# EAGLE board SparkFun_Qwiic_FS3000_proto_panel (EAGLE 9.6.2)
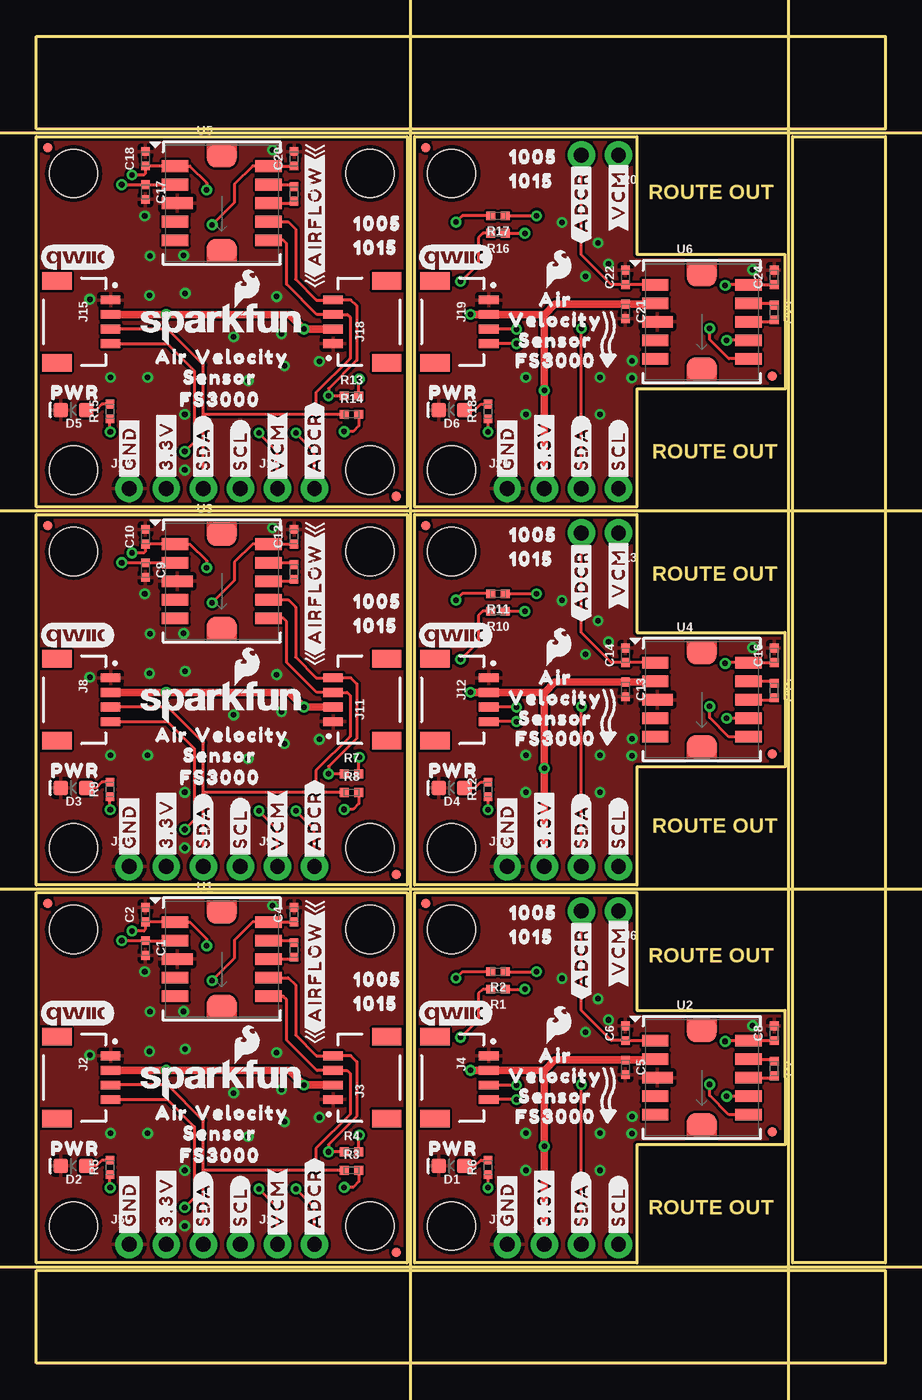
[diagram p0: board, top side]
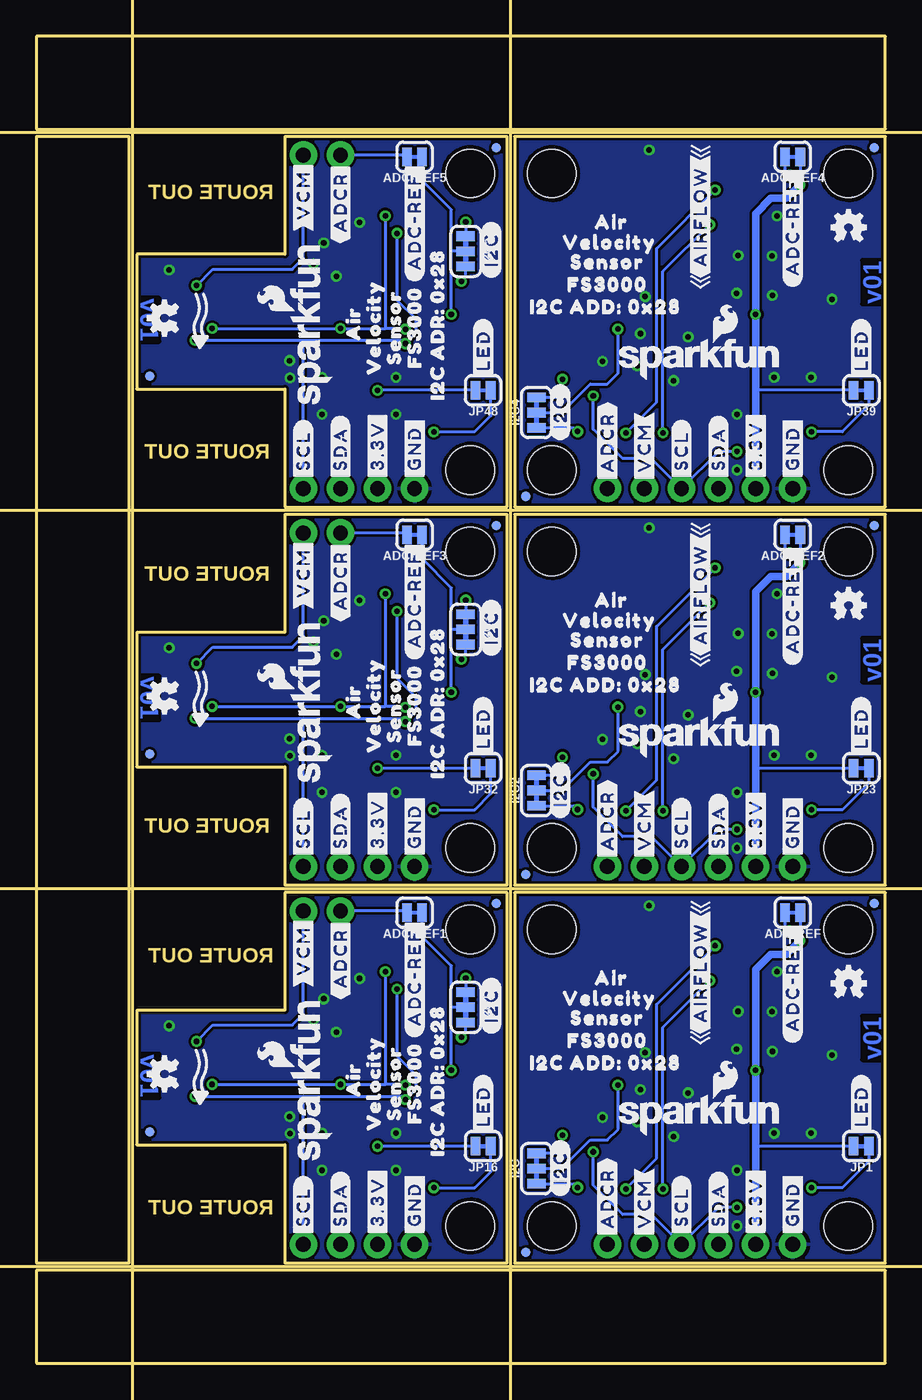
[diagram p1: board, bottom side, seen from below]

Size 58.17 x 90.93 mm. Coordinates in mm from the lower left corner, seen from the top.
Outline: 0,6.86 0,32.26 25.4,32.26 25.4,6.86 0,6.86
Outline: 25.91,6.86 25.91,32.26 41.15,32.26 41.15,24.18 51.28,24.18 51.31,14.96 41.15,14.96 41.15,6.86 25.91,6.86
Outline: 0,32.77 0,58.17 25.4,58.17 25.4,32.77 0,32.77
Outline: 25.91,32.77 25.91,58.17 41.15,58.17 41.15,50.09 51.28,50.09 51.31,40.87 41.15,40.87 41.15,32.77 25.91,32.77
Outline: 0,58.67 0,84.07 25.4,84.07 25.4,58.67 0,58.67
Outline: 25.91,58.67 25.91,84.07 41.15,84.07 41.15,76 51.28,76 51.31,66.78 41.15,66.78 41.15,58.67 25.91,58.67
Outline: 58.17,6.86 51.82,6.86 51.82,84.07 58.17,84.07 58.17,6.86
Outline: 58.17,90.93 58.17,84.58 0,84.58 0,90.93 58.17,90.93
Outline: 58.17,6.35 58.17,0 0,0 0,6.35 58.17,6.35
Copper layers (1*16): Top 0.035mm / dielectric 1.5mm / Bottom 0.035mm
Design rules "SparkFun-2-Layer-General-JLCPCB": minimum track width 7mil, minimum drill 0.3mm, track to track 7mil, track to pad 7mil, pad to pad 7mil, via to via 7mil, smd to smd 7mil, copper to edge 7mil, drill to drill 7mil, minimum pad ring 7mil, minimum via ring 7mil, stop-mask expansion 3mil, vias tented up to drill 25mil, thermal gap 10mil
Milling: 6 lines

## Footprints (pad centres in the part's own frame; a part is rotated, then mirrored left to right if it is on the bottom)
SMT-JUMPER_2_NC_TRACE_SILK = smd 0.66 x 1.27: 1 -0.521,0; 2 0.521,0
0402-TIGHT = smd 0.6 x 0.6: 1 -0.5,0; 2 0.5,0
LED-0603 = smd 1 x 1: A -0.877,0; C 0.877,0
SMT-JUMPER_3_2-NC_TRACE_SILK = smd 0.66 x 1.27: 1 -1.041,0; 2 0,0; 3 1.041,0
1X02_NO_SILK = drill 1.016 pad 1.88: 1 0,0; 2 2.54,0
JST04_1MM_RA = smd 0.6 x 1.35: 1 -1.5,0; 2 -0.5,0; 3 0.5,0; 4 1.5,0 | smd 1.2 x 2: NC1 2.8,-3.675; NC2 -2.8,-3.675
1X04_NO_SILK = drill 1.016 pad 1.88: 1 0,0; 2 2.54,0; 3 5.08,0; 4 7.62,0
FIDUCIAL-MICRO = smd 0.635 x 0.635: 1 0,0
STAND-OFF = hole 3.302: 0,0
FS3000 = smd 1.8 x 0.8: 1 -3.2,2.54; 2 -3.2,1.27; 4 -3.2,-1.27; 5 -3.2,-2.54; 6 3.2,-2.54; 7 3.2,-1.27; 8 3.2,0; 9 3.2,1.27; 10 3.2,2.54 | smd 2.1 x 0.8: 3 -3.05,0 | smd 2 x 1.59: 11 0,-3.24; 12 0,3.24

## Placement (x,y rotation side)
ADC-REF  [SMT-JUMPER_2_NC_TRACE_SILK]  6.35,30.86 180 bottom
ADC-REF1  [SMT-JUMPER_2_NC_TRACE_SILK]  32.26,30.86 180 bottom
ADC-REF2  [SMT-JUMPER_2_NC_TRACE_SILK]  6.35,56.77 180 bottom
ADC-REF3  [SMT-JUMPER_2_NC_TRACE_SILK]  32.26,56.77 180 bottom
ADC-REF4  [SMT-JUMPER_2_NC_TRACE_SILK]  6.35,82.68 180 bottom
ADC-REF5  [SMT-JUMPER_2_NC_TRACE_SILK]  32.26,82.68 180 bottom
C1  0.1uF  [0402-TIGHT]  7.47,28.45 270 top
C2  0.1uF  [0402-TIGHT]  7.47,30.73 90 top
C3  0.1uF  [0402-TIGHT]  17.65,28.32 270 top
C4  1.0uF  [0402-TIGHT]  17.65,30.73 90 top
C5  0.1uF  [0402-TIGHT]  40.36,20.27 270 top
C6  0.1uF  [0402-TIGHT]  40.36,22.61 90 top
C7  0.1uF  [0402-TIGHT]  50.55,20.19 270 top
C8  1.0uF  [0402-TIGHT]  50.55,22.61 90 top
C9  0.1uF  [0402-TIGHT]  7.47,54.36 270 top
C10  0.1uF  [0402-TIGHT]  7.47,56.64 90 top
C11  0.1uF  [0402-TIGHT]  17.65,54.23 270 top
C12  1.0uF  [0402-TIGHT]  17.65,56.64 90 top
C13  0.1uF  [0402-TIGHT]  40.36,46.18 270 top
C14  0.1uF  [0402-TIGHT]  40.36,48.51 90 top
C15  0.1uF  [0402-TIGHT]  50.55,46.1 270 top
C16  1.0uF  [0402-TIGHT]  50.55,48.51 90 top
C17  0.1uF  [0402-TIGHT]  7.47,80.26 270 top
C18  0.1uF  [0402-TIGHT]  7.47,82.55 90 top
C19  0.1uF  [0402-TIGHT]  17.65,80.14 270 top
C20  1.0uF  [0402-TIGHT]  17.65,82.55 90 top
C21  0.1uF  [0402-TIGHT]  40.36,72.09 270 top
C22  0.1uF  [0402-TIGHT]  40.36,74.42 90 top
C23  0.1uF  [0402-TIGHT]  50.55,72.01 270 top
C24  1.0uF  [0402-TIGHT]  50.55,74.42 90 top
D1  RED  [LED-0603]  28.45,13.51 180 top
D2  RED  [LED-0603]  2.54,13.51 180 top
D3  RED  [LED-0603]  2.54,39.42 180 top
D4  RED  [LED-0603]  28.45,39.42 180 top
D5  RED  [LED-0603]  2.54,65.33 180 top
D6  RED  [LED-0603]  28.45,65.33 180 top
I2C  [SMT-JUMPER_3_2-NC_TRACE_SILK]  23.9,13.34 90 bottom
I2C1  [SMT-JUMPER_3_2-NC_TRACE_SILK]  28.75,24.38 270 bottom
I2C2  [SMT-JUMPER_3_2-NC_TRACE_SILK]  23.9,39.24 90 bottom
I2C3  [SMT-JUMPER_3_2-NC_TRACE_SILK]  28.75,50.29 270 bottom
I2C4  [SMT-JUMPER_3_2-NC_TRACE_SILK]  23.9,65.15 90 bottom
I2C5  [SMT-JUMPER_3_2-NC_TRACE_SILK]  28.75,76.2 270 bottom
J1  [1X02_NO_SILK]  16.51,8.13 0 top
J2  QWIIC_RA  [JST04_1MM_RA]  5.08,19.56 270 top
J3  QWIIC_RA  [JST04_1MM_RA]  20.32,19.56 90 top
J4  QWIIC_RA  [JST04_1MM_RA]  30.99,19.56 270 top
J5  [1X04_NO_SILK]  6.35,8.13 0 top
J6  [1X02_NO_SILK]  39.88,30.99 180 top
J7  [1X04_NO_SILK]  32.26,8.13 0 top
J8  QWIIC_RA  [JST04_1MM_RA]  5.08,45.47 270 top
J9  [1X02_NO_SILK]  16.51,34.04 0 top
J10  [1X04_NO_SILK]  6.35,34.04 0 top
J11  QWIIC_RA  [JST04_1MM_RA]  20.32,45.47 90 top
J12  QWIIC_RA  [JST04_1MM_RA]  30.99,45.47 270 top
J13  [1X02_NO_SILK]  39.88,56.9 180 top
J14  [1X04_NO_SILK]  32.26,34.04 0 top
J15  QWIIC_RA  [JST04_1MM_RA]  5.08,71.37 270 top
J16  [1X02_NO_SILK]  16.51,59.94 0 top
J17  [1X04_NO_SILK]  6.35,59.94 0 top
J18  QWIIC_RA  [JST04_1MM_RA]  20.32,71.37 90 top
J19  QWIIC_RA  [JST04_1MM_RA]  30.99,71.37 270 top
J20  [1X02_NO_SILK]  39.88,82.8 180 top
J21  [1X04_NO_SILK]  32.26,59.94 0 top
JP1  LED  [SMT-JUMPER_2_NC_TRACE_SILK]  1.65,14.86 180 bottom
JP2  FIDUCIALUFIDUCIAL  [FIDUCIAL-MICRO]  24.64,7.59 0 top
JP3  STAND-OFF  [STAND-OFF]  2.54,29.72 0 top
JP4  STAND-OFF  [STAND-OFF]  22.86,29.72 0 top
JP5  FIDUCIALUFIDUCIAL  [FIDUCIAL-MICRO]  0.76,31.5 0 bottom
JP6  FIDUCIALUFIDUCIAL  [FIDUCIAL-MICRO]  0.76,31.5 0 top
JP7  STAND-OFF  [STAND-OFF]  22.86,9.4 0 top
JP8  STAND-OFF  [STAND-OFF]  2.54,9.4 0 top
JP9  STAND-OFF  [STAND-OFF]  28.45,29.72 0 top
JP10  FIDUCIALUFIDUCIAL  [FIDUCIAL-MICRO]  50.42,15.85 0 top
JP11  FIDUCIALUFIDUCIAL  [FIDUCIAL-MICRO]  24.64,7.59 0 bottom
JP12  FIDUCIALUFIDUCIAL  [FIDUCIAL-MICRO]  26.67,31.5 0 top
JP13  FIDUCIALUFIDUCIAL  [FIDUCIAL-MICRO]  50.42,15.85 0 bottom
JP14  FIDUCIALUFIDUCIAL  [FIDUCIAL-MICRO]  26.67,31.5 0 bottom
JP15  STAND-OFF  [STAND-OFF]  28.45,9.4 0 top
JP16  LED  [SMT-JUMPER_2_NC_TRACE_SILK]  27.56,14.86 180 bottom
JP17  STAND-OFF  [STAND-OFF]  2.54,55.63 0 top
JP18  FIDUCIALUFIDUCIAL  [FIDUCIAL-MICRO]  24.64,33.5 0 top
JP19  FIDUCIALUFIDUCIAL  [FIDUCIAL-MICRO]  0.76,57.4 0 top
JP20  FIDUCIALUFIDUCIAL  [FIDUCIAL-MICRO]  24.64,33.5 0 bottom
JP21  FIDUCIALUFIDUCIAL  [FIDUCIAL-MICRO]  0.76,57.4 0 bottom
JP22  STAND-OFF  [STAND-OFF]  2.54,35.31 0 top
JP23  LED  [SMT-JUMPER_2_NC_TRACE_SILK]  1.65,40.77 180 bottom
JP24  STAND-OFF  [STAND-OFF]  22.86,55.63 0 top
JP25  STAND-OFF  [STAND-OFF]  22.86,35.31 0 top
JP26  STAND-OFF  [STAND-OFF]  28.45,55.63 0 top
JP27  FIDUCIALUFIDUCIAL  [FIDUCIAL-MICRO]  50.42,41.76 0 top
JP28  FIDUCIALUFIDUCIAL  [FIDUCIAL-MICRO]  26.67,57.4 0 top
JP29  FIDUCIALUFIDUCIAL  [FIDUCIAL-MICRO]  50.42,41.76 0 bottom
JP30  FIDUCIALUFIDUCIAL  [FIDUCIAL-MICRO]  26.67,57.4 0 bottom
JP31  STAND-OFF  [STAND-OFF]  28.45,35.31 0 top
JP32  LED  [SMT-JUMPER_2_NC_TRACE_SILK]  27.56,40.77 180 bottom
JP33  STAND-OFF  [STAND-OFF]  2.54,81.53 0 top
JP34  FIDUCIALUFIDUCIAL  [FIDUCIAL-MICRO]  24.64,59.41 0 top
JP35  FIDUCIALUFIDUCIAL  [FIDUCIAL-MICRO]  0.76,83.31 0 top
JP36  FIDUCIALUFIDUCIAL  [FIDUCIAL-MICRO]  24.64,59.41 0 bottom
JP37  FIDUCIALUFIDUCIAL  [FIDUCIAL-MICRO]  0.76,83.31 0 bottom
JP38  STAND-OFF  [STAND-OFF]  2.54,61.21 0 top
JP39  LED  [SMT-JUMPER_2_NC_TRACE_SILK]  1.65,66.67 180 bottom
JP40  STAND-OFF  [STAND-OFF]  22.86,81.53 0 top
JP41  STAND-OFF  [STAND-OFF]  22.86,61.21 0 top
JP42  STAND-OFF  [STAND-OFF]  28.45,81.53 0 top
JP43  FIDUCIALUFIDUCIAL  [FIDUCIAL-MICRO]  50.42,67.67 0 top
JP44  FIDUCIALUFIDUCIAL  [FIDUCIAL-MICRO]  26.67,83.31 0 top
JP45  FIDUCIALUFIDUCIAL  [FIDUCIAL-MICRO]  50.42,67.67 0 bottom
JP46  FIDUCIALUFIDUCIAL  [FIDUCIAL-MICRO]  26.67,83.31 0 bottom
JP47  STAND-OFF  [STAND-OFF]  28.45,61.21 0 top
JP48  LED  [SMT-JUMPER_2_NC_TRACE_SILK]  27.56,66.67 180 bottom
LOGO1  OSHW-LOGOMINI  [OSHW-LOGO-MINI]  2.51,26.04 0 bottom
LOGO2  OSHW-LOGOMINI  [OSHW-LOGO-MINI]  49.4,19.81 90 bottom
LOGO3  SFE_LOGO_NAME_FLAME.1_INCH  [SFE_LOGO_NAME_FLAME_.1]  12.7,17.02 0 bottom
LOGO4  QWIIC_LOGO_5MM  [QWIIC_5MM]  2.79,24 0 top
LOGO5  SFE_LOGO_NAME_FLAME.1_INCH  [SFE_LOGO_NAME_FLAME_.1]  12.7,19.43 0 top
LOGO6  QWIIC_LOGO_5MM  [QWIIC_5MM]  28.7,24 0 top
LOGO7  SFE_LOGO_FLAME.1_INCH  [SFE_LOGO_FLAME_.1]  35.79,23.19 0 top
LOGO8  SFE_LOGO_NAME_FLAME.1_INCH  [SFE_LOGO_NAME_FLAME_.1]  39.37,19.43 90 bottom
LOGO9  OSHW-LOGOMINI  [OSHW-LOGO-MINI]  2.51,51.94 0 bottom
LOGO10  QWIIC_LOGO_5MM  [QWIIC_5MM]  2.79,49.91 0 top
LOGO11  SFE_LOGO_NAME_FLAME.1_INCH  [SFE_LOGO_NAME_FLAME_.1]  12.7,45.34 0 top
LOGO12  SFE_LOGO_NAME_FLAME.1_INCH  [SFE_LOGO_NAME_FLAME_.1]  12.7,42.93 0 bottom
LOGO13  OSHW-LOGOMINI  [OSHW-LOGO-MINI]  49.4,45.72 90 bottom
LOGO14  QWIIC_LOGO_5MM  [QWIIC_5MM]  28.7,49.91 0 top
LOGO15  SFE_LOGO_FLAME.1_INCH  [SFE_LOGO_FLAME_.1]  35.79,49.1 0 top
LOGO16  SFE_LOGO_NAME_FLAME.1_INCH  [SFE_LOGO_NAME_FLAME_.1]  39.37,45.34 90 bottom
LOGO17  OSHW-LOGOMINI  [OSHW-LOGO-MINI]  2.51,77.85 0 bottom
LOGO18  QWIIC_LOGO_5MM  [QWIIC_5MM]  2.79,75.82 0 top
LOGO19  SFE_LOGO_NAME_FLAME.1_INCH  [SFE_LOGO_NAME_FLAME_.1]  12.7,71.25 0 top
LOGO20  SFE_LOGO_NAME_FLAME.1_INCH  [SFE_LOGO_NAME_FLAME_.1]  12.7,68.83 0 bottom
LOGO21  OSHW-LOGOMINI  [OSHW-LOGO-MINI]  49.4,71.63 90 bottom
LOGO22  QWIIC_LOGO_5MM  [QWIIC_5MM]  28.7,75.82 0 top
LOGO23  SFE_LOGO_FLAME.1_INCH  [SFE_LOGO_FLAME_.1]  35.79,75.01 0 top
LOGO24  SFE_LOGO_NAME_FLAME.1_INCH  [SFE_LOGO_NAME_FLAME_.1]  39.37,71.25 90 bottom
R1  2.2k  [0402-TIGHT]  31.62,25.63 180 top
R2  2.2k  [0402-TIGHT]  31.62,26.82 180 top
R3  2.2k  [0402-TIGHT]  21.59,13.21 0 top
R4  2.2k  [0402-TIGHT]  21.59,14.48 0 top
R5  1k  [0402-TIGHT]  5.03,13.41 90 top
R6  1k  [0402-TIGHT]  30.94,13.41 90 top
R7  2.2k  [0402-TIGHT]  21.59,40.39 0 top
R8  2.2k  [0402-TIGHT]  21.59,39.12 0 top
R9  1k  [0402-TIGHT]  5.03,39.32 90 top
R10  2.2k  [0402-TIGHT]  31.62,51.54 180 top
R11  2.2k  [0402-TIGHT]  31.62,52.73 180 top
R12  1k  [0402-TIGHT]  30.94,39.32 90 top
R13  2.2k  [0402-TIGHT]  21.59,66.29 0 top
R14  2.2k  [0402-TIGHT]  21.59,65.02 0 top
R15  1k  [0402-TIGHT]  5.03,65.23 90 top
R16  2.2k  [0402-TIGHT]  31.62,77.44 180 top
R17  2.2k  [0402-TIGHT]  31.62,78.64 180 top
R18  1k  [0402-TIGHT]  30.94,65.23 90 top
U1  FS3000  [FS3000]  12.7,27.69 0 top
U2  FS3000  [FS3000]  45.59,19.56 0 top
U3  FS3000  [FS3000]  12.7,53.59 0 top
U4  FS3000  [FS3000]  45.59,45.47 0 top
U5  FS3000  [FS3000]  12.7,79.5 0 top
U6  FS3000  [FS3000]  45.59,71.37 0 top
U$1  [#GND#0]  32.26,8.64 90 top
U$2  [#GND#0]  32.26,8.64 90 bottom
U$3  [#SCL#0]  13.97,8.64 90 bottom
U$4  [#SDA#0]  11.43,8.64 90 bottom
U$5  [#GND#0]  6.35,8.64 90 top
U$6  [#GND#0]  6.35,8.64 90 bottom
U$7  [#3#3V#0]  8.89,8.64 90 top
U$8  [#3#3V#0]  8.89,8.64 90 bottom
U$9  [#SDA#0]  11.43,8.64 90 top
U$10  [#ADCR#4]  19.05,8.51 90 top
U$11  [#SCL#0]  13.97,8.64 90 top
U$12  [10050]  23.37,26.29 0 top
U$13  [#ADCR#4]  19.05,8.51 90 bottom
U$14  [FS30001]  12.57,14.22 0 top
U$15  [#ADC#REF#0]  6.35,30.1 90 bottom
U$16  [VELOCITY30003]  14.1,17.14 0 top
U$17  [FS30001]  19.05,22.1 0 bottom
U$18  [AIR30004]  9.27,17.14 0 top
U$19  [SENSOR30005]  12.57,15.75 0 top
U$20  [VELOCITY30003]  18.9,24.99 0 bottom
U$21  [AIR30004]  18.77,26.39 0 bottom
U$22  [SENSOR30005]  19.05,23.65 0 bottom
U$23  [#AIRFLOW#0]  19.08,26.82 90 top
U$24  [#LED#0]  1.65,15.49 90 bottom
U$25  [PWR0]  2.64,14.71 0 top
U$26  [#AIRFLOW#0]  12.67,26.77 90 bottom
U$27  [#I2C#0]  22.28,15.24 90 bottom
U$28  [I2C_ADD#_0X280]  19.18,20.57 0 bottom
U$29  [10150]  23.24,24.64 0 top
U$30  [#VCM#3]  16.51,8.51 90 top
U$31  [#VCM#3]  16.51,8.51 90 bottom
U$32  [#3#3V#0]  34.8,8.64 90 top
U$33  [#3#3V#0]  34.8,8.64 90 bottom
U$34  [#SDA#0]  37.34,8.64 90 top
U$35  [#SCL#0]  39.88,8.64 90 top
U$36  [#LED#0]  27.56,15.49 90 bottom
U$37  [PWR0]  28.55,14.71 0 top
U$38  [#I2C#0]  27,26.37 90 bottom
U$39  [#VCM#0]  39.88,30.61 90 top
U$40  [#ADCR#0]  37.34,30.48 90 top
U$41  [#SCL#0]  39.88,8.64 90 bottom
U$42  [#SDA#0]  37.34,8.64 90 bottom
U$43  [#VCM#0]  39.88,30.61 90 bottom
U$44  [#ADCR#0]  37.34,30.48 90 bottom
U$45  [FS30001]  35.56,16.89 0 top
U$46  [VELOCITY30003]  35.56,19.68 0 top
U$47  [AIR30004]  35.56,21.08 0 top
U$48  [SENSOR30005]  35.56,18.29 0 top
U$49  [#ADC#REF#0]  32.26,30.48 90 bottom
U$50  [FS30001]  32.26,19.18 90 bottom
U$51  [VELOCITY30003]  35.05,19.18 90 bottom
U$52  [AIR30004]  36.45,19.43 90 bottom
U$53  [SENSOR30005]  33.66,19.18 90 bottom
U$54  [10050]  34.04,30.86 0 top
U$55  [10150]  33.91,29.21 0 top
U$56  [I2C_ADR#_0X280]  30.68,19.35 90 bottom
U$57  [#GND#0]  6.35,34.54 90 top
U$58  [#GND#0]  6.35,34.54 90 bottom
U$59  [#3#3V#0]  8.89,34.54 90 top
U$60  [#3#3V#0]  8.89,34.54 90 bottom
U$61  [#SDA#0]  11.43,34.54 90 top
U$62  [#SCL#0]  13.97,34.54 90 top
U$63  [#LED#0]  1.65,41.4 90 bottom
U$64  [PWR0]  2.64,40.61 0 top
U$65  [#I2C#0]  22.28,41.15 90 bottom
U$66  [#SCL#0]  13.97,34.54 90 bottom
U$67  [#SDA#0]  11.43,34.54 90 bottom
U$68  [FS30001]  12.57,40.13 0 top
U$69  [VELOCITY30003]  14.1,43.05 0 top
U$70  [AIR30004]  9.27,43.05 0 top
U$71  [SENSOR30005]  12.57,41.66 0 top
U$72  [#ADC#REF#0]  6.35,56.01 90 bottom
U$73  [FS30001]  19.05,48.01 0 bottom
U$74  [VELOCITY30003]  18.9,50.9 0 bottom
U$75  [AIR30004]  18.77,52.3 0 bottom
U$76  [SENSOR30005]  19.05,49.56 0 bottom
U$77  [#AIRFLOW#0]  19.08,52.73 90 top
U$78  [#AIRFLOW#0]  12.67,52.68 90 bottom
U$79  [I2C_ADD#_0X280]  19.18,46.48 0 bottom
U$80  [10050]  23.37,52.2 0 top
U$81  [10150]  23.24,50.55 0 top
U$82  [#ADCR#4]  19.05,34.42 90 top
U$83  [#ADCR#4]  19.05,34.42 90 bottom
U$84  [#VCM#3]  16.51,34.42 90 top
U$85  [#VCM#3]  16.51,34.42 90 bottom
U$86  [#GND#0]  32.26,34.54 90 top
U$87  [#GND#0]  32.26,34.54 90 bottom
U$88  [#3#3V#0]  34.8,34.54 90 top
U$89  [#3#3V#0]  34.8,34.54 90 bottom
U$90  [#SDA#0]  37.34,34.54 90 top
U$91  [#SCL#0]  39.88,34.54 90 top
U$92  [#LED#0]  27.56,41.4 90 bottom
U$93  [PWR0]  28.55,40.61 0 top
U$94  [#I2C#0]  27,52.27 90 bottom
U$95  [#VCM#0]  39.88,56.52 90 top
U$96  [#ADCR#0]  37.34,56.39 90 top
U$97  [#SCL#0]  39.88,34.54 90 bottom
U$98  [#SDA#0]  37.34,34.54 90 bottom
U$99  [#VCM#0]  39.88,56.52 90 bottom
U$100  [#ADCR#0]  37.34,56.39 90 bottom
U$101  [FS30001]  35.56,42.8 0 top
U$102  [VELOCITY30003]  35.56,45.59 0 top
U$103  [AIR30004]  35.56,46.99 0 top
U$104  [SENSOR30005]  35.56,44.2 0 top
U$105  [#ADC#REF#0]  32.26,56.39 90 bottom
U$106  [FS30001]  32.26,45.09 90 bottom
U$107  [VELOCITY30003]  35.05,45.09 90 bottom
U$108  [AIR30004]  36.45,45.34 90 bottom
U$109  [SENSOR30005]  33.66,45.09 90 bottom
U$110  [10050]  34.04,56.77 0 top
U$111  [10150]  33.91,55.12 0 top
U$112  [I2C_ADR#_0X280]  30.68,45.26 90 bottom
U$113  [#GND#0]  6.35,60.45 90 top
U$114  [#GND#0]  6.35,60.45 90 bottom
U$115  [#3#3V#0]  8.89,60.45 90 top
U$116  [#3#3V#0]  8.89,60.45 90 bottom
U$117  [#SDA#0]  11.43,60.45 90 top
U$118  [#SCL#0]  13.97,60.45 90 top
U$119  [#LED#0]  1.65,67.31 90 bottom
U$120  [PWR0]  2.64,66.52 0 top
U$121  [#I2C#0]  22.28,67.06 90 bottom
U$122  [#SCL#0]  13.97,60.45 90 bottom
U$123  [#SDA#0]  11.43,60.45 90 bottom
U$124  [FS30001]  12.57,66.04 0 top
U$125  [VELOCITY30003]  14.1,68.96 0 top
U$126  [AIR30004]  9.27,68.96 0 top
U$127  [SENSOR30005]  12.57,67.56 0 top
U$128  [#ADC#REF#0]  6.35,81.92 90 bottom
U$129  [FS30001]  19.05,73.91 0 bottom
U$130  [VELOCITY30003]  18.9,76.81 0 bottom
U$131  [AIR30004]  18.77,78.21 0 bottom
U$132  [SENSOR30005]  19.05,75.46 0 bottom
U$133  [#AIRFLOW#0]  19.08,78.64 90 top
U$134  [#AIRFLOW#0]  12.67,78.59 90 bottom
U$135  [I2C_ADD#_0X280]  19.18,72.39 0 bottom
U$136  [10050]  23.37,78.11 0 top
U$137  [10150]  23.24,76.45 0 top
U$138  [#ADCR#4]  19.05,60.33 90 top
U$139  [#ADCR#4]  19.05,60.33 90 bottom
U$140  [#VCM#3]  16.51,60.33 90 top
U$141  [#VCM#3]  16.51,60.33 90 bottom
U$142  [#GND#0]  32.26,60.45 90 top
U$143  [#GND#0]  32.26,60.45 90 bottom
U$144  [#3#3V#0]  34.8,60.45 90 top
U$145  [#3#3V#0]  34.8,60.45 90 bottom
U$146  [#SDA#0]  37.34,60.45 90 top
U$147  [#SCL#0]  39.88,60.45 90 top
U$148  [#LED#0]  27.56,67.31 90 bottom
U$149  [PWR0]  28.55,66.52 0 top
U$150  [#I2C#0]  27,78.18 90 bottom
U$151  [#VCM#0]  39.88,82.42 90 top
U$152  [#ADCR#0]  37.34,82.3 90 top
U$153  [#SCL#0]  39.88,60.45 90 bottom
U$154  [#SDA#0]  37.34,60.45 90 bottom
U$155  [#VCM#0]  39.88,82.42 90 bottom
U$156  [#ADCR#0]  37.34,82.3 90 bottom
U$157  [FS30001]  35.56,68.71 0 top
U$158  [VELOCITY30003]  35.56,71.5 0 top
U$159  [AIR30004]  35.56,72.9 0 top
U$160  [SENSOR30005]  35.56,70.1 0 top
U$161  [#ADC#REF#0]  32.26,82.3 90 bottom
U$162  [FS30001]  32.26,70.99 90 bottom
U$163  [VELOCITY30003]  35.05,70.99 90 bottom
U$164  [AIR30004]  36.45,71.25 90 bottom
U$165  [SENSOR30005]  33.66,70.99 90 bottom
U$166  [10050]  34.04,82.68 0 top
U$167  [10150]  33.91,81.03 0 top
U$168  [I2C_ADR#_0X280]  30.68,71.17 90 bottom

## Library data of the parts
ADC-REF ADC-REF1-ADC-REF5 I2C I2C1-I2C5 JP1 JP16 JP23 JP32 JP39 JP48 = SparkFun-Jumpers
C1-C3 C5-C7 C9-C11 C13-C15 C17-C19 C21-C23 = SparkFun-Capacitors; PROD_ID: CAP-12416
C4 C8 C12 C16 C20 C24 = SparkFun-Capacitors; PROD_ID: CAP-12417
D1-D6 = SparkFun-LED; PROD_ID: DIO-00819
J1 J6 J9 J13 J16 J20 = SparkFun-Connectors
J2 J4 J8 J12 J15 J19 = SparkFun-Connectors; PROD_ID: CONN-13694; VALUE: QWIIC_RIGHT_ANGLE
J3 J11 J18 = SparkFun-Connectors; PROD_ID: CONN-13694
J5 J7 J10 J14 J17 J21 = SparkFun-Connectors; PROD_ID: CONN-09696
JP2 JP5 JP6 JP10-JP14 JP18-JP21 JP27-JP30 JP34-JP37 JP43-JP46 LOGO1-LOGO24 = SparkFun-Aesthetics
JP3 JP4 JP7-JP9 JP15 JP17 JP22 JP24-JP26 JP31 JP33 JP38 JP40-JP42 JP47 = SparkFun-Hardware
R1-R4 R7 R8 R10 R11 R13 R14 R16 R17 = SparkFun-Resistors; PROD_ID: RES-14341
R5 R6 R9 R12 R15 R18 = SparkFun-Resistors; PROD_ID: RES-14342
U1-U6 = FS3000; PROD_ID: IC-16078
U$1-U$9 U$11 U$12 U$14-U$29 U$32-U$81 U$86-U$137 U$142-U$168 = output
U$10 U$13 U$30 U$31 U$82-U$85 U$138-U$141 = FS3000

## Nets
3.3V: ADC-REF.1 C1.1 I2C.2 J2.2 J3.2 J5.2 JP1.2 U1.2
3.3V1: ADC-REF1.1 C5.1 I2C1.2 J4.2 J7.2 JP16.2 U2.2
3.3V2: ADC-REF2.1 C9.1 I2C2.2 J8.2 J10.2 J11.2 JP23.2 U3.2
3.3V3: ADC-REF3.1 C13.1 I2C3.2 J12.2 J14.2 JP32.2 U4.2
3.3V4: ADC-REF4.1 C17.1 I2C4.2 J15.2 J17.2 J18.2 JP39.2 U5.2
3.3V5: ADC-REF5.1 C21.1 I2C5.2 J19.2 J21.2 JP48.2 U6.2
ADC-REF: ADC-REF.2 C2.1 J1.2 U1.1
ADC-REF1: ADC-REF1.2 C6.1 J6.2 U2.1
ADC-REF2: ADC-REF2.2 C10.1 J9.2 U3.1
ADC-REF3: ADC-REF3.2 C14.1 J13.2 U4.1
ADC-REF4: ADC-REF4.2 C18.1 J16.2 U5.1
ADC-REF5: ADC-REF5.2 C22.1 J20.2 U6.1
GND: C1.2 C2.2 C4.2 D2.C J2.1 J3.1 J5.1 U1.3
GND1: C5.2 C6.2 C8.2 D1.C J4.1 J7.1 U2.3
GND2: C9.2 C10.2 C12.2 D3.C J8.1 J10.1 J11.1 U3.3
GND3: C13.2 C14.2 C16.2 D4.C J12.1 J14.1 U4.3
GND4: C17.2 C18.2 C20.2 D5.C J15.1 J17.1 J18.1 U5.3
GND5: C21.2 C22.2 C24.2 D6.C J19.1 J21.1 U6.3
N$1: I2C.1 R3.2
N$2: I2C.3 R4.2
N$3: C3.1 U1.9
N$4: C3.2 U1.8
N$5: I2C1.1 R2.2
N$6: D2.A R5.2
N$7: I2C1.3 R1.2
N$8: JP1.1 R5.1
N$9: D1.A R6.2
N$10: JP16.1 R6.1
N$11: C7.1 U2.9
N$12: C7.2 U2.8
N$13: I2C2.1 R8.2
N$14: I2C2.3 R7.2
N$15: D3.A R9.2
N$16: JP23.1 R9.1
N$17: C11.1 U3.9
N$18: C11.2 U3.8
N$19: I2C3.1 R11.2
N$20: I2C3.3 R10.2
N$21: D4.A R12.2
N$22: JP32.1 R12.1
N$23: C15.1 U4.9
N$24: C15.2 U4.8
N$25: I2C4.1 R14.2
N$26: I2C4.3 R13.2
N$27: D5.A R15.2
N$28: JP39.1 R15.1
N$29: C19.1 U5.9
N$30: C19.2 U5.8
N$31: I2C5.1 R17.2
N$32: I2C5.3 R16.2
N$33: D6.A R18.2
N$34: JP48.1 R18.1
N$35: C23.1 U6.9
N$36: C23.2 U6.8
SCL: J2.4 J3.4 J5.4 R4.1 U1.7
SCL1: J4.4 J7.4 R1.1 U2.7
SCL2: J8.4 J10.4 J11.4 R7.1 U3.7
SCL3: J12.4 J14.4 R10.1 U4.7
SCL4: J15.4 J17.4 J18.4 R13.1 U5.7
SCL5: J19.4 J21.4 R16.1 U6.7
SDA: J2.3 J3.3 J5.3 R3.1 U1.6
SDA1: J4.3 J7.3 R2.1 U2.6
SDA2: J8.3 J10.3 J11.3 R8.1 U3.6
SDA3: J12.3 J14.3 R11.1 U4.6
SDA4: J15.3 J17.3 J18.3 R14.1 U5.6
SDA5: J19.3 J21.3 R17.1 U6.6
VCM: C4.1 J1.1 U1.10
VCM1: C8.1 J6.1 U2.10
VCM2: C12.1 J9.1 U3.10
VCM3: C16.1 J13.1 U4.10
VCM4: C20.1 J16.1 U5.10
VCM5: C24.1 J20.1 U6.10

## Tracks (layer width: path | path; a pad name or v marks a point on that pad's centre or on a via)
3.3V  (via drill 0.38)
  Top 0.203: v5.84,28.96 C1.1 9.49,28.95 U1.2
  Top 0.508: J2.2 8.88,20.06 | 8.88,20.06 v8.89,20.07 | J3.2 v18.33,19.06 17.33,20.06 8.88,20.06
  Bottom 0.203: ADC-REF.1 5.83,28.97 v5.84,28.96 | JP1.2 8.89,14.86 | I2C.2 22.17,13.34 20.22,15.29 19.05,15.29 18.31,16.03 18.31,19.04 v18.33,19.06
  Bottom 0.508: J5.2 8.89,14.86 v8.89,20.07 8.89,26.98 7.85,28.02 6.78,28.02 v5.84,28.96
3.3V1  (via drill 0.38)
  Top 0.508: 34.8,20.06 J4.2 29.75,20.06 v29.74,20.07 | 34.8,20.06 34.81,20.06 35.53,20.77 C5.1 42.33,20.77 U2.2 | J7.2 v34.8,14.86 34.8,20.06
  Bottom 0.203: JP16.2 v34.8,14.86 | v29.74,20.07 29.74,24.38 | 29.74,24.38 29.74,27.23 31.74,29.22 ADC-REF1.1 | I2C1.2 29.74,24.38
3.3V2  (via drill 0.38)
  Top 0.203: v5.84,54.86 C9.1 U3.2
  Top 0.508: J8.2 v8.88,45.97 | v8.88,45.97 v8.89,45.97 | J11.2 v18.33,44.97 17.33,45.97 v8.88,45.97
  Bottom 0.203: ADC-REF2.1 5.83,54.88 v5.84,54.86 | JP23.2 8.89,40.77 | I2C2.2 22.17,39.24 20.22,41.2 19.05,41.2 18.31,41.94 18.31,44.95 v18.33,44.97
  Bottom 0.508: J10.2 8.89,40.77 v8.89,45.97 8.89,52.88 7.85,53.92 6.78,53.92 v5.84,54.86
3.3V3  (via drill 0.38)
  Top 0.508: 34.8,45.97 J12.2 29.75,45.97 v29.74,45.97 | 34.8,45.97 34.81,45.97 35.53,46.68 C13.1 42.33,46.68 U4.2 | J14.2 v34.8,40.77 34.8,45.97
  Bottom 0.203: JP32.2 v34.8,40.77 | v29.74,45.97 29.74,50.29 | 29.74,50.29 29.74,53.14 31.74,55.13 ADC-REF3.1 | I2C3.2 29.74,50.29
3.3V4  (via drill 0.38)
  Top 0.203: v5.84,80.77 7.46,80.77 C17.1 U5.2
  Top 0.508: J15.2 v8.88,71.87 | v8.88,71.87 v8.89,71.88 | J18.2 v18.33,70.87 17.33,71.87 v8.88,71.87
  Bottom 0.203: ADC-REF4.1 5.83,80.78 v5.84,80.77 | JP39.2 8.89,66.67 | I2C4.2 22.17,65.15 20.22,67.11 19.05,67.11 18.31,67.84 18.31,70.86 v18.33,70.87
  Bottom 0.508: J17.2 8.89,66.67 v8.89,71.88 8.89,78.79 7.85,79.83 6.78,79.83 v5.84,80.77
3.3V5  (via drill 0.38)
  Top 0.508: 34.8,71.87 J19.2 29.75,71.87 v29.74,71.88 | 34.8,71.87 34.81,71.87 35.53,72.58 C21.1 42.33,72.58 U6.2 | J21.2 v34.8,66.67 34.8,71.87
  Bottom 0.203: JP48.2 v34.8,66.67 | v29.74,71.88 29.74,76.2 | 29.74,76.2 29.74,79.05 31.74,81.04 ADC-REF5.1 | I2C5.2 29.74,76.2
ADC-REF  (via drill 0.38)
  Top 0.203: v6.55,29.62 7.36,29.62 7.47,29.73 C2.1 U1.1 10.52,30.23 11.66,29.08 v11.66,28.6 | J1.2 19.05,10.67 v17.78,11.94
  Bottom 0.203: v6.55,29.62 6.87,29.93 ADC-REF.2 | v11.66,28.6 15.67,24.59 15.67,14.05 v17.78,11.94
ADC-REF1
  Top 0.203: U2.1 40.37,22.1 C6.1 39.39,22.11 37.34,24.16 J6.2
  Bottom 0.203: ADC-REF1.2 32.91,30.99 J6.2
ADC-REF2  (via drill 0.38)
  Top 0.203: v6.55,55.52 7.36,55.52 7.47,55.63 C10.1 9.49,56.14 U3.1 10.52,56.13 11.66,54.99 v11.66,54.51 | J9.2 19.05,36.58 v17.78,37.85
  Bottom 0.203: v6.55,55.52 6.87,55.84 ADC-REF2.2 | v11.66,54.51 15.67,50.49 15.67,39.95 v17.78,37.85
ADC-REF3
  Top 0.203: U4.1 C14.1 39.39,48.01 37.34,50.06 J13.2
  Bottom 0.203: ADC-REF3.2 32.91,56.9 J13.2
ADC-REF4  (via drill 0.38)
  Top 0.203: v6.55,81.43 7.36,81.43 7.47,81.54 C18.1 U5.1 10.52,82.04 11.66,80.9 v11.66,80.42 | J16.2 19.05,62.48 v17.78,63.75
  Bottom 0.203: v6.55,81.43 6.87,81.75 ADC-REF4.2 | v11.66,80.42 15.67,76.4 15.67,65.86 v17.78,63.75
ADC-REF5
  Top 0.203: U6.1 C22.1 39.39,73.92 37.34,75.97 J20.2
  Bottom 0.203: ADC-REF5.2 32.91,82.8 J20.2
GND  (via drill 0.38)
  other vias: 19.38,16.84 16.79,18.75 16.99,16.54 10.08,24.1 10.19,21.51 7.75,21.36 7.77,24.08 16.18,31.34 7.42,26.82 3.66,21.11 14.5,15.52 13.51,18.52 7.62,15.75 5.08,15.75 10.16,9.4 10.16,13.21 16.46,21.29
  pour Bottom: 0,6.86 0,32.26 25.4,32.26 25.4,6.86
  pour Top: 0,6.86 0,32.26 25.4,32.26 25.4,6.86
GND1  (via drill 0.38)
  other vias: 49.07,23.11 39.19,23.52 37.62,22.68 36.02,26.37 38.48,24.97 38.61,13.21 38.61,15.75 33.53,15.75 33.53,13.21 40.82,16.89 40.79,15.72
  pour Bottom: 25.91,6.86 25.91,32.26 51.31,32.26 51.31,6.86
  pour Top: 25.91,6.86 25.91,32.26 51.31,32.26 51.31,6.86
GND2  (via drill 0.38)
  other vias: 19.38,42.75 16.79,44.65 16.99,42.44 10.08,50.01 10.19,47.42 7.75,47.27 7.77,49.99 16.18,57.25 7.42,52.73 3.66,47.02 14.5,41.43 13.51,44.42 7.62,41.66 5.08,41.66 10.16,35.31 10.16,39.12 16.46,47.19
  pour Bottom: 0,32.77 0,58.17 25.4,58.17 25.4,32.77
  pour Top: 0,32.77 0,58.17 25.4,58.17 25.4,32.77
GND3  (via drill 0.38)
  other vias: 49.07,49.02 39.19,49.43 37.62,48.59 36.02,52.27 38.48,50.88 38.61,39.12 38.61,41.66 33.53,41.66 33.53,39.12 40.82,42.8 40.79,41.63
  pour Bottom: 25.91,32.77 25.91,58.17 51.31,58.17 51.31,32.77
  pour Top: 25.91,32.77 25.91,58.17 51.31,58.17 51.31,32.77
GND4  (via drill 0.38)
  other vias: 19.38,68.66 16.79,70.56 16.99,68.35 10.08,75.92 10.19,73.33 7.75,73.18 7.77,75.9 16.18,83.16 7.42,78.64 3.66,72.92 14.5,67.34 13.51,70.33 7.62,67.56 5.08,67.56 10.16,61.21 10.16,65.02 16.46,73.1
  pour Bottom: 0,58.67 0,84.07 25.4,84.07 25.4,58.67
  pour Top: 0,58.67 0,84.07 25.4,84.07 25.4,58.67
GND5  (via drill 0.38)
  other vias: 49.07,74.93 39.19,75.34 37.62,74.5 36.02,78.18 38.48,76.78 38.61,65.02 38.61,67.56 33.53,67.56 33.53,65.02 40.82,68.71 40.79,67.54
  pour Bottom: 25.91,58.67 25.91,84.07 51.31,84.07 51.31,58.67
  pour Top: 25.91,58.67 25.91,84.07 51.31,84.07 51.31,58.67
N$1  (via drill 0.38)
  Top 0.203: R3.2 22.09,12.44 21.69,12.04 v21.08,12.04
  Bottom 0.203: I2C.1 21.34,12.29 v21.08,12.04
N$2  (via drill 0.38)
  Top 0.203: R4.2 22.09,15.59 v22.12,15.62
  Bottom 0.203: v22.12,15.62 22.12,14.83 22.58,14.38 I2C.3
N$3
  Top 0.203: U1.9 17.52,28.96 C3.1
N$4
  Top 0.203: U1.8 17.52,27.69 C3.2
N$5  (via drill 0.38)
  Top 0.203: R2.2 29.18,26.82 v28.75,26.39
  Bottom 0.203: v28.75,26.39 I2C1.1
N$6
  Top 0.203: R5.2 4.49,13.91 4.09,13.51 D2.A
N$7  (via drill 0.38)
  Top 0.203: R1.2 30.58,25.63 30.28,25.32 30.28,23.52 29.08,22.33 v29.06,22.33
  Bottom 0.203: v29.06,22.33 28.75,22.63 I2C1.3
N$8  (via drill 0.38)
  Top 0.203: v5.05,12.01 5.03,12.04 R5.1
  Bottom 0.203: JP1.1 1.13,13.83 2.95,12.01 v5.05,12.01
N$9
  Top 0.203: D1.A 30.05,13.51 30.45,13.91 R6.2
N$10  (via drill 0.38)
  Top 0.203: R6.1 v30.94,12.01
  Bottom 0.203: v30.94,12.01 28.14,12.01 27.04,13.12 JP16.1
N$11
  Top 0.203: U2.9 50.41,20.83 C7.1
N$12
  Top 0.203: U2.8 50.41,19.56 C7.2
N$13  (via drill 0.38)
  Top 0.203: R8.2 22.09,38.35 21.69,37.95 v21.08,37.95
  Bottom 0.203: I2C2.1 21.34,38.2 v21.08,37.95
N$14  (via drill 0.38)
  Top 0.203: R7.2 22.09,41.5 v22.12,41.53
  Bottom 0.203: v22.12,41.53 22.12,40.74 22.58,40.28 I2C2.3
N$15
  Top 0.203: R9.2 4.49,39.82 4.09,39.42 D3.A
N$16  (via drill 0.38)
  Top 0.203: v5.05,37.92 5.03,37.95 R9.1
  Bottom 0.203: JP23.1 1.13,39.74 2.95,37.92 v5.05,37.92
N$17
  Top 0.203: U3.9 17.52,54.86 C11.1
N$18
  Top 0.203: U3.8 17.52,53.59 C11.2
N$19  (via drill 0.38)
  Top 0.203: R11.2 29.18,52.73 v28.75,52.3
  Bottom 0.203: v28.75,52.3 I2C3.1
N$20  (via drill 0.38)
  Top 0.203: R10.2 30.58,51.54 30.28,51.23 30.28,49.43 29.08,48.23 v29.06,48.23
  Bottom 0.203: v29.06,48.23 28.75,48.54 I2C3.3
N$21
  Top 0.203: D4.A 30.05,39.42 30.45,39.82 R12.2
N$22  (via drill 0.38)
  Top 0.203: R12.1 v30.94,37.92
  Bottom 0.203: v30.94,37.92 28.14,37.92 27.04,39.03 JP32.1
N$23
  Top 0.203: U4.9 50.41,46.74 C15.1
N$24
  Top 0.203: U4.8 50.41,45.47 C15.2
N$25  (via drill 0.38)
  Top 0.203: R14.2 22.09,64.25 21.69,63.86 v21.08,63.86
  Bottom 0.203: I2C4.1 21.34,64.11 v21.08,63.86
N$26  (via drill 0.38)
  Top 0.203: R13.2 22.09,67.4 v22.12,67.44
  Bottom 0.203: v22.12,67.44 22.12,66.65 22.58,66.19 I2C4.3
N$27
  Top 0.203: R15.2 4.49,65.73 4.09,65.33 D5.A
N$28  (via drill 0.38)
  Top 0.203: v5.05,63.83 5.03,63.86 R15.1
  Bottom 0.203: JP39.1 1.13,65.65 2.95,63.83 v5.05,63.83
N$29
  Top 0.203: U5.9 17.52,80.77 C19.1
N$30
  Top 0.203: U5.8 17.52,79.5 C19.2
N$31  (via drill 0.38)
  Top 0.203: R17.2 29.18,78.64 v28.75,78.21
  Bottom 0.203: v28.75,78.21 I2C5.1
N$32  (via drill 0.38)
  Top 0.203: R16.2 30.58,77.44 30.28,77.14 30.28,75.34 29.08,74.14 v29.06,74.14
  Bottom 0.203: v29.06,74.14 28.75,74.45 I2C5.3
N$33
  Top 0.203: D6.A 30.05,65.33 30.45,65.73 R18.2
N$34  (via drill 0.38)
  Top 0.203: R18.1 v30.94,63.83
  Bottom 0.203: v30.94,63.83 28.14,63.83 27.04,64.94 JP48.1
N$35
  Top 0.203: U6.9 50.41,72.64 C23.1
N$36
  Top 0.203: U6.8 50.41,71.37 C23.2
SCL  (via drill 0.38)
  Top 0.203: U1.7 17.25,26.42 17.75,25.91 17.75,22.48 19.18,21.06 J3.4 21.54,21.06 21.95,20.65 21.95,16.92 20.02,14.99 v20.02,14.48 R4.1 | J2.4 8.97,18.06 10.82,16.2 10.82,11.33 v10.16,10.67
  Bottom 0.203: v10.16,10.67 11.43,10.67 J5.4 16.03,10.19 18.01,10.19 20.02,12.19 v20.02,14.48
SCL1  (via drill 0.38)
  Top 0.203: U2.7 v47.3,18.29 | v32.89,18.06 J4.4 | R1.1 v33.47,25.63
  Bottom 0.203: v47.3,18.29 39.88,18.29 | 39.88,18.29 33.12,18.29 v32.89,18.06 32.18,18.77 32.18,19.76 33.47,21.04 v33.47,25.63 | J7.4 39.88,18.29
SCL2  (via drill 0.38)
  Top 0.203: U3.7 17.25,52.32 17.75,51.82 17.75,48.39 19.18,46.97 J11.4 21.54,46.97 21.95,46.56 21.95,42.82 20.02,40.89 v20.02,40.39 R7.1 | J8.4 8.97,43.97 10.82,42.11 10.82,37.24 v10.16,36.58
  Bottom 0.203: v10.16,36.58 11.43,36.58 J10.4 16.03,36.09 18.01,36.09 20.02,38.1 v20.02,40.39
SCL3  (via drill 0.38)
  Top 0.203: U4.7 v47.3,44.2 | v32.89,43.97 J12.4 | R10.1 v33.47,51.54
  Bottom 0.203: v47.3,44.2 39.88,44.2 | 39.88,44.2 33.12,44.2 v32.89,43.97 32.18,44.68 32.18,45.67 33.47,46.95 v33.47,51.54 | J14.4 39.88,44.2
SCL4  (via drill 0.38)
  Top 0.203: U5.7 17.25,78.23 17.75,77.72 17.75,74.3 19.18,72.87 J18.4 21.54,72.87 21.95,72.47 21.95,68.73 20.02,66.8 v20.02,66.29 R13.1 | J15.4 8.97,69.87 10.82,68.02 10.82,63.14 v10.16,62.48
  Bottom 0.203: v10.16,62.48 11.43,62.48 J17.4 16.03,62 18.01,62 20.02,64.01 v20.02,66.29
SCL5  (via drill 0.38)
  Top 0.203: U6.7 v47.3,70.1 | v32.89,69.88 J19.4 | R16.1 v33.47,77.44
  Bottom 0.203: v47.3,70.1 39.88,70.1 | 39.88,70.1 33.12,70.1 v32.89,69.88 32.18,70.59 32.18,71.58 33.47,72.86 v33.47,77.44 | J21.4 39.88,70.1
SDA
  Top 0.203: U1.6 16.92,25.15 17.14,24.92 17.14,22.12 19.21,20.06 J3.3 21.29,20.06 21.49,19.86 21.49,17.04 19.15,14.71 19.15,13.21 | J2.3 8.98,19.06 11.43,16.61 11.43,13.21 | J5.3 11.43,13.21 | R3.1 19.15,13.21 | 19.15,13.21 11.43,13.21
SDA1  (via drill 0.38)
  Top 0.203: U2.6 47.45,17.02 46.13,18.34 v46.13,19.1 | v32.89,19.05 J4.3 | J7.3 v37.34,19.1 | R2.1 v34.27,26.82
  Bottom 0.203: v46.13,19.1 v37.34,19.1 34.27,19.1 | v32.89,19.05 32.94,19.1 34.27,19.1 | v34.27,26.82 34.27,19.1
SDA2
  Top 0.203: U3.6 16.92,51.05 17.14,50.83 17.14,48.03 19.21,45.97 J11.3 21.29,45.97 21.49,45.77 21.49,42.95 19.15,40.62 19.15,39.12 | J8.3 8.98,44.97 11.43,42.52 11.43,39.12 | J10.3 11.43,39.12 | R8.1 19.15,39.12 | 19.15,39.12 11.43,39.12
SDA3  (via drill 0.38)
  Top 0.203: U4.6 47.45,42.93 46.13,44.25 v46.13,45.01 | v32.89,44.96 31,44.96 J12.3 | J14.3 v37.34,45.01 | R11.1 v34.27,52.73
  Bottom 0.203: v46.13,45.01 v37.34,45.01 34.27,45.01 | v32.89,44.96 32.94,45.01 34.27,45.01 | v34.27,52.73 34.27,45.01
SDA4
  Top 0.203: U5.6 16.92,76.96 17.14,76.73 17.14,73.94 19.21,71.87 J18.3 21.29,71.87 21.49,71.68 21.49,68.86 19.15,66.52 19.15,65.02 | J15.3 8.98,70.87 11.43,68.43 11.43,65.02 | J17.3 11.43,65.02 | R14.1 19.15,65.02 | 19.15,65.02 11.43,65.02
SDA5  (via drill 0.38)
  Top 0.203: U6.6 47.45,68.83 46.13,70.16 v46.13,70.92 | v32.89,70.87 J19.3 | J21.3 v37.34,70.92 | R17.1 v34.27,78.64
  Bottom 0.203: v46.13,70.92 v37.34,70.92 34.27,70.92 | v32.89,70.87 32.94,70.92 34.27,70.92 | v34.27,78.64 34.27,70.92
VCM  (via drill 0.38)
  Top 0.203: C4.1 U1.10 14.81,30.23 13.56,28.98 13.56,27.74 v12.04,26.21 | J1.1 16.51,10.67 v15.24,11.94
  Bottom 0.203: v12.04,26.21 15.24,23.01 v15.24,11.94
VCM1  (via drill 0.38)
  Top 0.203: C8.1 48.8,22.11 U2.10 47.24,22.1 v47.19,22.05
  Bottom 0.203: J6.1 39.88,23.93 40.64,23.16 46.08,23.16 v47.19,22.05
VCM2  (via drill 0.38)
  Top 0.203: C12.1 U3.10 14.81,56.13 13.56,54.89 13.56,53.65 v12.04,52.12 | J9.1 16.51,36.58 v15.24,37.85
  Bottom 0.203: v12.04,52.12 15.24,48.92 v15.24,37.85
VCM3  (via drill 0.38)
  Top 0.203: C16.1 48.8,48.01 U4.10 47.24,48.01 v47.19,47.95
  Bottom 0.203: J13.1 39.88,49.84 40.64,49.07 46.08,49.07 v47.19,47.95
VCM4  (via drill 0.38)
  Top 0.203: C20.1 U5.10 14.81,82.04 13.56,80.8 13.56,79.55 v12.04,78.03 | J16.1 16.51,62.48 v15.24,63.75
  Bottom 0.203: v12.04,78.03 15.24,74.83 v15.24,63.75
VCM5  (via drill 0.38)
  Top 0.203: C24.1 48.8,73.92 U6.10 47.24,73.91 v47.19,73.86
  Bottom 0.203: J20.1 39.88,75.74 40.64,74.98 46.08,74.98 v47.19,73.86

## Text on the board
Bottom: v01 | v01 | v01 | v01 | v01 | v01
Dimension: ROUTE OUT | ROUTE OUT | ROUTE OUT | ROUTE OUT | ROUTE OUT | ROUTE OUT
Milling: V-Score | V-Score | V-Score | V-Score | V-Score | V-Score